# Altium PCB PCB_main_SAFMR.PcbDoc (part 3 of 3)
Units mm, origin at the board's own origin, x right, y up, seen from the top; angles counter-clockwise.
Board outline 128.65 x 96.9 mm, 4 copper layers (Top Layer 1, Top Layer, Bottom Layer, Bottom Layer 1), stack 0.603 mm thick; 100 components, 147 nets, 534 pads, 161 vias.
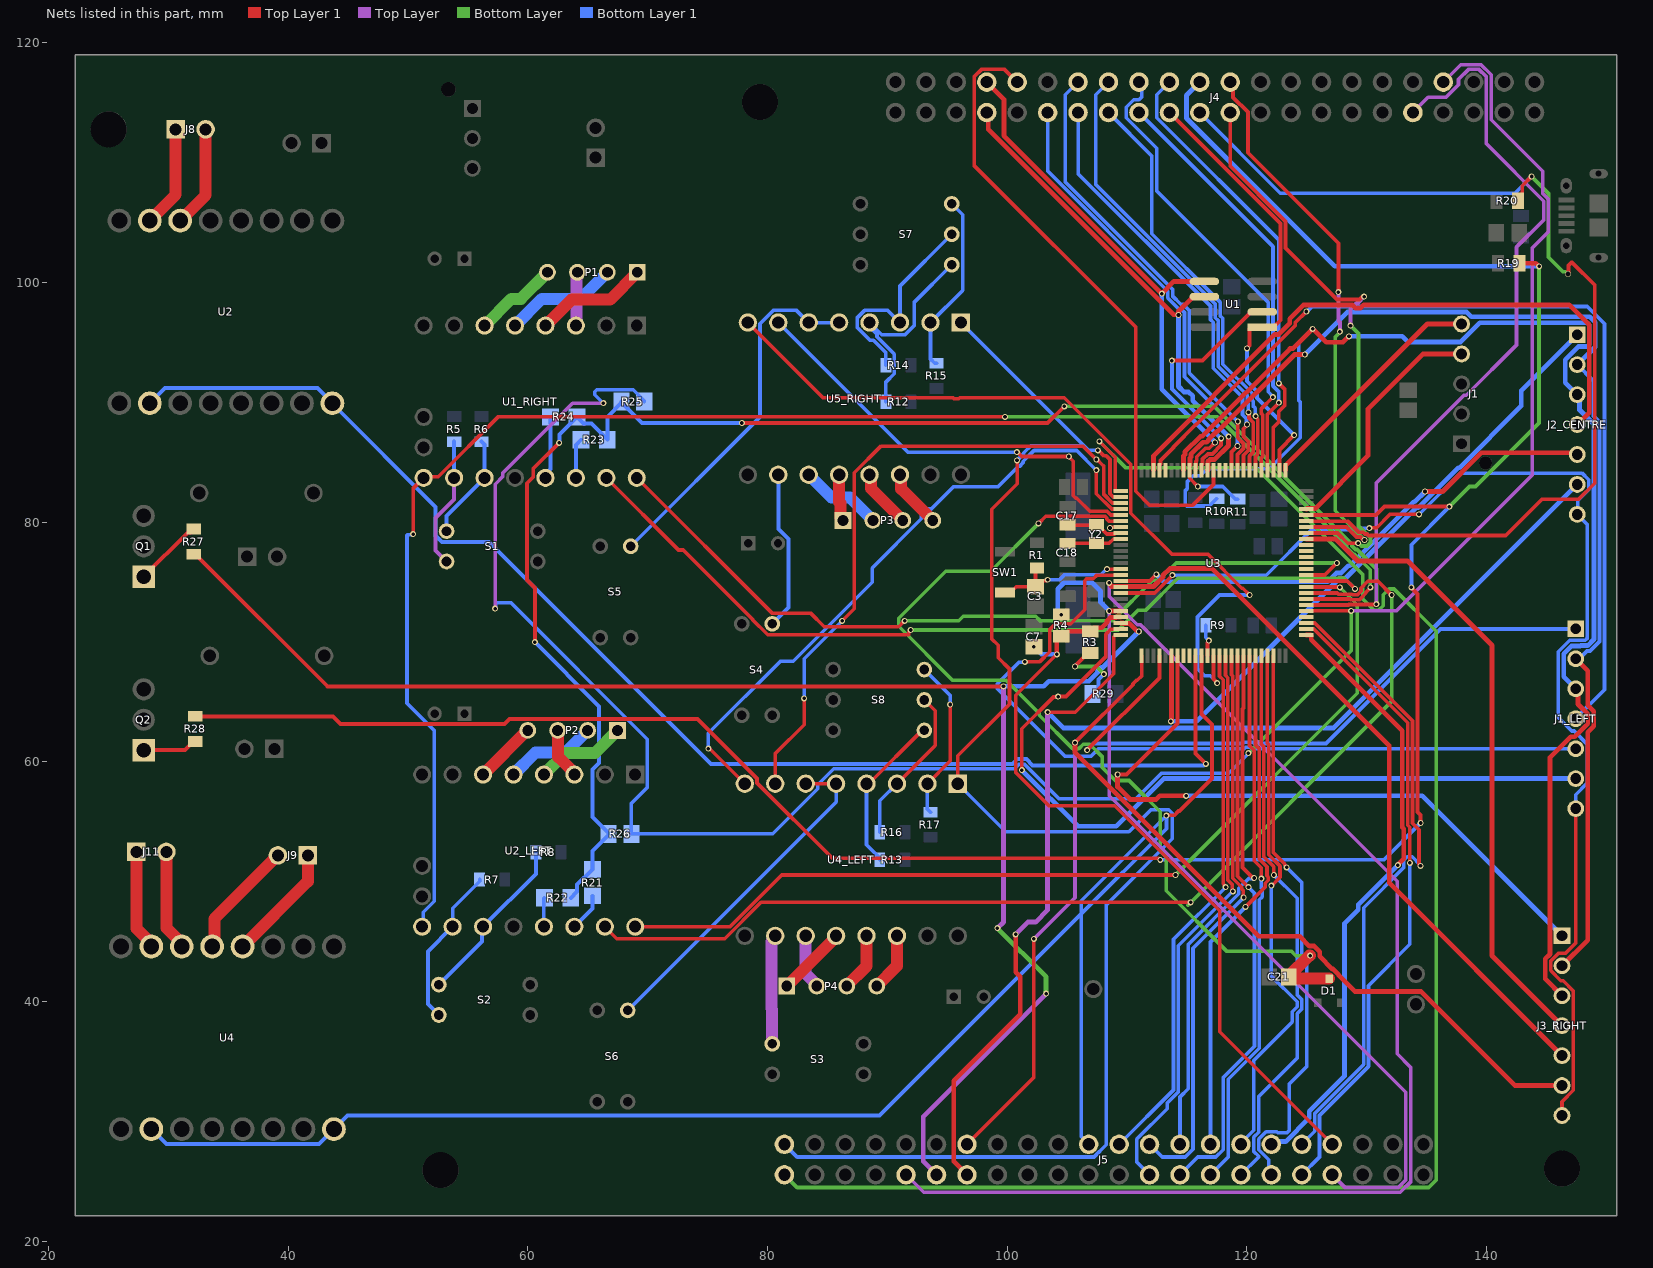
[diagram p4: the nets of this part, all layers, seen from the top]

## Via types
v1: diameter 0.5, hole 0.3, Top Layer 1 to Bottom Layer 1, 159 vias
v2: diameter 0.5, hole 0.4, Top Layer 1 to Bottom Layer 1, 2 vias

## Nets (pads, with @x,y where several pads share a name; then routed paths per layer and width w, separated by ;. In a path a pad name is that pad's centre, name@x,y a point inside that pad or via, vN(x,y) a via of type N, cw(c..) or ccw(c..) an arc to the next point about the centre after c; other vN are vias at no path point) (continued)
NetJ8_1: J8.1 U2.7 | length 8.5
  Top Layer 1 w1: U2.7@28.448,105.156 30.607,107.315 J8.1@30.607,112.776
NetJ8_2: J8.2 U2.6 | length 8.5
  Top Layer 1 w1: U2.6@30.988,105.156 33.107,107.275 J8.2@33.107,112.776
NetJ9_1: J9.1 U4.4 | length 9.9
  Top Layer 1 w1: U4.4@36.195,44.577 41.636,50.018 J9.1@41.636,52.18
NetJ9_2: J9.2 U4.5 | length 9.9
  Top Layer 1 w1: U4.5@33.655,44.577 33.843,44.765 33.843,46.887 J9.2@39.136,52.18
NetJ11_1: J11.1 U4.7 | length 8.4
  Top Layer 1 w1: J11.1@27.325,52.468 27.325,46.092 28.575,44.842 U4.7@28.575,44.577
NetJ11_2: J11.2 U4.6 | length 8.4
  Top Layer 1 w1: J11.2@29.825,52.468 29.825,46.132 31.115,44.842 U4.6@31.115,44.577
NetP1_1: P1.1 U1_RIGHT.4 | length 9.5
  Top Layer 1 w1: U1_RIGHT.4@61.468,96.393 63.639,98.564 66.861,98.564 P1.1@69.135,100.838
NetP1_2: P1.2 U1_RIGHT.5 | length 9.5
  Bottom Layer 1 w1: U1_RIGHT.5@58.928,96.393 61.161,98.626 64.423,98.626 P1.2@66.635,100.838
NetP1_3: P1.3 U1_RIGHT.3 | length 4.5
  Top Layer w1: U1_RIGHT.3@64.008,96.393 64.072,96.456 64.072,100.774 P1.3@64.135,100.838
NetP1_4: P1.4 U1_RIGHT.6 | length 7.1
  Bottom Layer w1: U1_RIGHT.6@56.388,96.393 58.621,98.626 59.423,98.626 P1.4@61.635,100.838
NetP2_1: P2.1 U2_LEFT.4 | length 7.7
  Bottom Layer w1: U2_LEFT.4@61.341,58.928 63.131,60.718 65.591,60.718 P2.1@67.484,62.611
NetP2_2: P2.2 U2_LEFT.5 | length 7.7
  Bottom Layer 1 w1: U2_LEFT.5@58.801,58.928 60.653,60.78 63.153,60.78 P2.2@64.984,62.611
NetP2_3: P2.3 U2_LEFT.3 | length 4.3
  Top Layer 1 w1: P2.3@62.484,62.611 62.535,62.56 62.535,60.411 63.881,59.065 U2_LEFT.3@63.881,58.928
NetP2_4: P2.4 U2_LEFT.6 | length 5.2
  Top Layer 1 w1: U2_LEFT.6@56.261,58.928 56.281,58.928 59.964,62.611 P2.4@59.984,62.611
NetP3_1: P3.1 U5_RIGHT.12 | length 3.9
  Top Layer 1 w1: U5_RIGHT.12@85.979,83.947 85.979,81.682 86.093,81.568 86.093,80.337 P3.1@86.293,80.137
NetP3_2: P3.2 U5_RIGHT.11 | length 6.9
  Bottom Layer 1 w1: U5_RIGHT.11@83.439,83.947 85.356,82.03 86.9,82.03 P3.2@88.793,80.137
NetP3_3: P3.3 U5_RIGHT.13 | length 5
  Top Layer 1 w1: U5_RIGHT.13@88.519,83.947 88.62,83.846 88.62,82.81 P3.3@91.293,80.137
NetP3_4: P3.4 U5_RIGHT.14 | length 4.9
  Top Layer 1 w1: U5_RIGHT.14@91.059,83.947 91.16,83.846 91.16,82.77 P3.4@93.793,80.137
NetP4_1: P4.1 U4_LEFT.12 | length 5.9
  Top Layer 1 w1: P4.1@81.614,41.275 85.725,45.386 U4_LEFT.12@85.725,45.466
NetP4_2: P4.2 U4_LEFT.11 | length 4.6
  Top Layer w1: U4_LEFT.11@83.185,45.466 83.185,42.312 84.114,41.383 P4.2@84.114,41.275
NetP4_3: P4.3 U4_LEFT.13 | length 4.9
  Top Layer 1 w1: P4.3@86.614,41.275 86.614,41.287 88.265,42.938 U4_LEFT.13@88.265,45.466
NetP4_4: P4.4 U4_LEFT.14 | length 4.9
  Top Layer 1 w1: P4.4@89.114,41.275 90.805,42.966 U4_LEFT.14@90.805,45.466
NetQ1_1: Q1.1 R27.2 | length 5.8
  Top Layer 1 w0.33: Q1.1@27.94,75.438 31.626,79.124 31.846,79.124 R27.2@32.131,79.409
NetQ2_1: Q2.1 R28.2 | length 4.6
  Top Layer 1 w0.33: Q2.1@27.94,60.96 31.38,60.96 32.108,61.688 R28.2@32.258,61.688
NetR5_2: R5.2 S1.2 U1_RIGHT.15 | length 11
  Top Layer w0.33: S1.2@53.213,76.708 52.294,77.627 52.294,80.344 53.848,81.898 U1_RIGHT.15@53.848,83.693
  Bottom Layer 1 w0.33: U1_RIGHT.15@53.848,83.693 R5.2@53.848,86.707
NetR6_2: R6.2 S1.1 U1_RIGHT.14 | length 8.9
  Bottom Layer 1 w0.33: S1.1@53.213,79.248 53.213,80.518 U1_RIGHT.14@56.388,83.693 56.388,86.453 R6.2@56.134,86.707
NetR7_2: R7.2 S2.2 U2_LEFT.15 | length 13.5
  Bottom Layer 1 w0.3: U2_LEFT.15@53.721,46.228 53.721,47.763 55.973,50.015 R7.2@55.973,50.165
  Bottom Layer 1 w0.33: S2.2@52.578,38.862 51.659,39.781 51.659,44.166 U2_LEFT.15@53.721,46.228
NetR8_2: R8.2 S2.1 U2_LEFT.14 | length 14.4
  Bottom Layer 1 w0.33: S2.1@52.578,41.402 56.155,44.979 56.155,46.122 U2_LEFT.14@56.261,46.228 60.672,50.639 R8.2@60.672,52.451
NetR12_2: R12.2 S7.1 U5_RIGHT.4 | length 18.6
  Bottom Layer 1 w0.3: R12.2@89.882,90.043 89.882,91.687 90.582,92.387 90.582,94.018 89.134,95.466 89.134,95.699 88.519,96.314 U5_RIGHT.4@88.519,96.647 89.534,95.632 91.479,95.632 92.232,96.385 92.232,98.328 S7.1@95.377,101.473
NetR13_2: R13.2 S8.1 U4_LEFT.4 | length 13.5
  Top Layer 1 w0.3: U4_LEFT.4@88.265,58.166 88.455,58.166 92.9,62.611 S8.1@93.091,62.611
  Bottom Layer 1 w0.3: U4_LEFT.4@88.265,58.166 88.265,53.075 89.374,51.966 R13.2@89.374,51.816
NetR14_2: R14.2 S7.2 U5_RIGHT.3 | length 18.5
  Bottom Layer 1 w0.3: R14.2@89.882,93.091 89.882,94.141 88.839,95.184 88.547,95.184 87.504,96.227 87.504,97.067 88.099,97.662 90.044,97.662 U5_RIGHT.3@91.059,96.647 91.059,99.695 S7.2@95.377,104.013
NetR15_2: R15.2 S7.3 U5_RIGHT.2 | length 15.1
  Bottom Layer 1 w0.3: R15.2@94.107,93.252 93.957,93.252 93.599,93.61 U5_RIGHT.2@93.599,96.647 96.281,99.329 96.281,105.649 S7.3@95.377,106.553
NetR16_2: R16.2 S8.2 U4_LEFT.3 | length 13.3
  Top Layer 1 w0.3: U4_LEFT.3@90.805,58.166 93.995,61.356 93.995,64.247 S8.2@93.091,65.151
  Bottom Layer 1 w0.3: R16.2@89.374,54.102 89.374,56.735 U4_LEFT.3@90.805,58.166
NetR17_2: R17.2 S8.3 U4_LEFT.2 | length 13.7
  Top Layer 1 w0.3: U4_LEFT.2@93.345,58.166 95.25,60.071 v1(95.25,64.77)
  Bottom Layer 1 w0.3: S8.3@93.091,67.691 95.25,65.532 v1(95.25,64.77) ; U4_LEFT.2@93.345,58.166 93.345,56.041 R17.2@93.599,55.787
NetR21_2: R21.2 U2_LEFT.11 | length 3.2
  Bottom Layer 1 w0.33: U2_LEFT.11@63.881,46.228 65.405,47.752 R21.2@65.405,48.811
NetR22_2: R22.2 U2_LEFT.12 | length 2.4
  Bottom Layer 1 w0.3: U2_LEFT.12@61.341,46.228 61.341,48.598 R22.2@61.384,48.641
NetR23_2: R23.2 U1_RIGHT.11 | length 3.4
  Bottom Layer 1 w0.33: U1_RIGHT.11@64.008,83.693 64.008,86.444 R23.2@64.432,86.868
NetR24_2: R24.2 U1_RIGHT.12 | length 5.3
  Bottom Layer 1 w0.33: U1_RIGHT.12@61.468,83.693 61.468,84.012 61.892,84.436 R24.2@61.892,88.773
NetS3_1: S3.1 U4_LEFT.10 | length 9.2
  Top Layer w1: S3.1@80.391,36.449 80.391,39.339 80.314,39.416 80.314,44.992 80.645,45.323 U4_LEFT.10@80.645,45.466
NetS4_1: S4.1 U5_RIGHT.10 | length 13.4
  Bottom Layer 1 w0.33: S4.1@80.391,71.501 81.744,72.854 81.744,78.59 80.899,79.435 U5_RIGHT.10@80.899,83.947
NetS5_1: S5.1 U5_RIGHT.5 U5_RIGHT.6 | length 30.5
  Bottom Layer 1 w0.3: S5.1@68.58,77.978 79.374,88.772 79.374,96.557 80.479,97.662 82.424,97.662 U5_RIGHT.6@83.439,96.647 U5_RIGHT.5@85.979,96.647
NetS6_1: S6.1 U4_LEFT.5 U4_LEFT.6 | length 28.7
  Top Layer 1 w0.3: U4_LEFT.6@83.185,58.166 U4_LEFT.5@85.725,58.166
  Bottom Layer 1 w0.3: S6.1@68.326,39.243 85.725,56.642 U4_LEFT.5@85.725,58.166
NetU2_10: U2.10 U2.16 U3.35 | length 112.9
  Top Layer 1 w0.33: U3.35@115.721,68.831 115.721,60.682 v1(116.586,59.817)
  Bottom Layer 1 w0.33: U2.10@28.448,89.916 29.703,91.171 42.433,91.171 U2.16@43.688,89.916 43.688,89.872 52.294,81.266 52.294,78.867 52.832,78.329 56.769,78.329 75.281,59.817 100.44,59.817 100.84,60.217 101.598,60.217 102.132,59.683 116.406,59.683 116.54,59.817 v1(116.586,59.817)
PA0: J5.34 R27.1 U3.23 | length 134.6
  Top Layer 1 w0.33: R27.1@32.131,77.309 32.281,77.309 43.296,66.294 v1(99.695,66.294)
  Top Layer 1 w0.4: U3.23@109.471,71.581 109.678,71.581 109.718,71.541 110.195,71.541 110.851,70.885 110.979,70.885 v1(110.998,70.866)
  Top Layer w0.4: J5.34@94.107,25.527 92.997,26.637 92.997,30.386 v1(103.251,40.64) ; v1(99.187,46.101) 99.695,46.609 v1(99.695,66.294)
  Bottom Layer w0.4: v1(99.187,46.101) 103.251,42.037 v1(103.251,40.64)
  Bottom Layer 1 w0.4: v1(99.695,66.294) 103.047,66.294 103.466,66.713 106.823,66.713 107.527,67.418 107.527,67.538 107.849,67.86 107.992,67.86 v1(110.998,70.866)
PA1: J1_LEFT.6 U3.24 | length 66.1
  Top Layer 1 w0.3: v1(101.219,59.302) 101.219,62.754 103.868,65.403 104.242,65.403 v1(104.261,65.422) 104.28,65.441 104.909,65.441 108.243,68.775 108.243,70.651 108.633,71.041 109.071,71.041 109.111,71.081 U3.24@109.471,71.081
  Bottom Layer 1 w0.4: v1(101.219,59.302) 101.226,59.302 105.918,54.61 109.093,54.61 113.07,58.587 J1_LEFT.6@147.447,58.587
PA2: J2_CENTRE.6 J5.32 U3.25 | length 106.7
  Top Layer 1 w0.3: v1(103.378,64.135) 105.68,64.135 108.89,67.345 108.89,70.44 109.031,70.581 U3.25@109.471,70.581
  Top Layer 1 w0.4: J5.32@96.647,25.527 95.537,26.637 95.537,33.362 101.092,38.917 101.092,42.051 100.711,42.432 v1(100.711,45.593)
  Top Layer w0.4: v1(100.711,45.593) 101.737,46.619 102.372,46.619 103.378,47.625 v1(103.378,64.135)
  Bottom Layer 1 w0.4: v1(103.378,64.135) 104.69,62.823 127.259,62.823 J2_CENTRE.6@147.574,83.138
PA3: J3_RIGHT.6 J5.31 U3.26 | length 100.1
  Top Layer 1 w0.3: J5.31@96.647,28.067 102.235,33.655 v1(102.235,45.212) ; v1(105.664,61.595) 110.498,66.429 110.498,66.501 110.791,66.794 110.863,66.794 111.221,67.152 U3.26@111.221,68.831
  Top Layer 1 w0.4: v1(105.664,61.595) 105.664,60.745 120.982,45.427 124.415,45.427 125.226,44.615 125.614,44.615 126.082,44.146 126.082,43.759 127.147,42.694 127.204,42.694 127.673,42.225 127.673,42.168 129.03,40.811 134.549,40.811 142.387,32.973 J3_RIGHT.6@146.304,32.973
  Top Layer w0.3: v1(102.235,45.212) 105.664,48.641 v1(105.664,61.595)
PA4: J1_LEFT.1 U3.29 | length 55.4
  Top Layer 1 w0.33: v1(106.68,60.96) 112.721,67.001 U3.29@112.721,68.831
  Bottom Layer 1 w0.33: v1(106.68,60.96) 107.222,61.502 119.623,61.502 119.742,61.621 120.521,61.621 120.64,61.502 126.596,61.502 136.181,71.087 J1_LEFT.1@147.447,71.087
PA6: J2_CENTRE.1 U3.31 | length 53.5
  Top Layer 1 w0.4: v1(113.665,63.373) 113.665,63.4 113.721,63.456 U3.31@113.721,68.831
  Bottom Layer 1 w0.4: v1(113.665,63.373) 115.808,63.373 127.681,75.246 128.189,75.246 134.138,81.195 134.297,81.195 137.64,84.538 137.757,84.538 142.91,89.691 142.91,90.974 J2_CENTRE.1@147.574,95.638
PA7: J3_RIGHT.1 U3.32 | length 55.9
  Top Layer 1 w0.33: v1(109.22,58.928) 109.948,58.928 114.221,63.201 U3.32@114.221,68.831
  Top Layer 1 w0.4: v1(109.22,58.928) 109.22,57.896 110.262,56.854 112.437,56.854 112.733,57.15 v1(114.935,57.15)
  Bottom Layer 1 w0.4: v1(114.935,57.15) 134.627,57.15 J3_RIGHT.1@146.304,45.473
PA8: J3_RIGHT.4 U3.67 | length 53.3
  Top Layer 1 w0.4: U3.67@124.971,78.581 127.417,78.581 129.249,76.749 133.436,76.749 140.462,69.723 140.462,43.815 J3_RIGHT.4@146.304,37.973
PA9: J4.22 U3.68 | length 49.4
  Top Layer 1 w0.33: J4.22@118.618,114.173 118.618,109.701 123.223,105.096 123.223,102.871 127.509,98.585 129.413,98.585 129.601,98.773 129.761,98.773 v1(129.794,98.806) ; U3.68@124.971,79.081 127.575,79.081 128.424,78.232 v1(129.286,78.232)
  Top Layer w0.33: v1(128.651,96.393) 128.651,97.79 129.143,98.282 129.265,98.282 129.789,98.806 v1(129.794,98.806)
  Bottom Layer w0.33: v1(128.651,96.393) 129.312,95.732 129.312,79.677 129.974,79.015 130.036,79.015 130.338,78.714 130.338,78.287 130.036,77.985 129.579,77.985 129.332,78.232 v1(129.286,78.232)
PA10: J4.21 U3.69 | length 48.5
  Top Layer 1 w0.33: J4.21@118.618,116.713 118.865,116.466 118.865,115.446 120.083,114.228 120.083,110.819 127.635,103.267 v1(127.635,99.187) ; U3.69@124.971,79.581 128.318,79.581 129.152,78.747 129.499,78.747 129.661,78.585 129.692,78.585 129.777,78.5 v1(129.823,78.5)
  Top Layer w0.33: v1(127.635,99.187) 127.635,96.795 127.762,96.668 v1(127.762,95.885)
  Bottom Layer w0.33: v1(127.762,95.885) 127.762,95.839 127.381,95.458 127.381,80.942 v1(129.823,78.5)
PA11: J4.24 R20.2 U3.70 | length 89.8
  Top Layer 1 w0.3: U3.70@124.971,80.081 128.405,80.081 129.324,79.162 129.671,79.162 129.833,79 130.03,79 130.155,78.875 141.601,78.875 144.614,81.888 147.668,81.888 149.024,83.244 149.024,99.78 147.137,101.667 147.098,101.667 146.842,101.411 146.842,100.741 v2(146.812,100.711) ; R20.2@142.634,106.807 142.988,107.161 142.988,108.063 v1(143.764,108.839)
  Bottom Layer w0.3: v1(143.764,108.839) 145.18,107.423 145.18,102.089 146.368,100.901 146.567,100.901 146.758,100.711 v2(146.812,100.711)
  Bottom Layer 1 w0.3: J4.24@116.078,114.173 122.801,107.45 142.375,107.45 v1(143.764,108.839)
PA12: J4.23 R19.2 R28.1 U3.71 | length 212.5
  Top Layer 1 w0.33: R28.1@32.258,63.788 43.737,63.788 44.382,63.143 58.035,63.143 58.468,63.576 74.152,63.576 79.135,58.593 79.135,58.219 85.411,51.943 112.649,51.943 v1(112.776,51.816) ; U3.71@124.971,80.581 130.781,80.581 131.48,81.28 v1(136.906,81.28) ; v1(133.731,74.549) 133.731,74.511 134.239,74.003 134.239,55.793 134.48,55.553 134.48,54.916 v1(134.512,54.883)
  Top Layer 1 w0.4: R19.2@142.761,101.6 144.118,101.6 144.372,101.346 v1(144.399,101.346)
  Bottom Layer w0.33: v1(136.906,81.28) 138.577,82.951 139.099,82.951 144.399,88.251 v1(144.399,101.346)
  Bottom Layer 1 w0.33: v1(112.776,51.816) 131.445,51.816 v1(134.512,54.883) ; v1(133.731,74.549) 133.731,78.105 v1(136.906,81.28)
  Bottom Layer 1 w0.4: J4.23@116.051,116.686 114.968,115.603 114.968,113.713 127.335,101.346 v1(144.399,101.346)
PA13: J1.4 U3.72 | length 20.6
  Top Layer 1 w0.4: U3.72@124.971,81.081 125.011,81.121 125.695,81.121 130.107,85.533 130.107,89.424 134.71,94.027 J1.4@137.922,94.027
PA14: J1.5 U3.76 | length 20
  Top Layer 1 w0.4: U3.76@123.221,84.331 123.221,84.691 135.057,96.527 J1.5@137.922,96.527
PA15: J4.26 U1.1 U3.77 | length 38.1
  Top Layer 1 w0.33: J4.26@113.538,114.173 122.793,104.918 122.793,96.843 122.216,96.266 U1.1@121.291,96.266 120.366,96.266 120.219,96.119 120.219,94.738 120.015,94.534 v1(120.015,94.488) ; U3.77@122.721,84.331 122.721,86.018 v1(123.952,87.249)
  Bottom Layer 1 w0.33: v1(120.015,94.488) 120.015,91.752 120.857,90.91 120.857,90.344 v1(123.952,87.249)
PB1: J5.23 U3.36 U4.10 U4.16 | length 143.6
  Top Layer 1 w0.33: v1(113.284,55.499) 113.317,55.532 113.952,55.532 114.3,55.88 114.393,55.88 117.101,58.588 117.101,63.098 116.221,63.978 U3.36@116.221,68.831
  Bottom Layer 1 w0.3: J5.23@106.807,28.067 106.18,28.694 106.18,47.299 106.18,48.395 v1(113.284,55.499)
  Bottom Layer 1 w0.33: U4.10@28.575,29.337 29.83,28.082 42.56,28.082 U4.16@43.815,29.337 44.958,30.48 89.361,30.48 106.18,47.299 113.284,54.403 v1(113.284,55.499)
PB2: R9.2 U3.37 | length 2.7
  Top Layer 1 w0.3: U3.37@116.721,68.831 116.721,69.931 116.84,70.05 v1(116.84,70.104)
  Bottom Layer 1 w0.3: R9.2@116.586,71.374 116.586,70.372 116.84,70.118 v1(116.84,70.104)
PB3: J4.38 U1.6 U3.89 | length 42.6
  Top Layer 1 w0.4: J4.38@98.298,114.173 98.422,114.049 98.422,112.763 113.884,97.301 114.281,97.301 v1(114.3,97.282) 114.3,97.572 115.534,98.806 U1.6@116.459,98.806 ; U3.89@116.721,84.331 116.761,84.371 116.761,85.055 116.937,85.231 117.323,85.231 118.472,86.38 118.472,87.103 v1(118.491,87.122)
  Bottom Layer 1 w0.4: v1(114.3,97.282) 114.3,91.313 114.766,90.847 115.163,90.847 115.485,90.525 115.485,90.128 v1(118.491,87.122)
PB4: U1.2 U3.90 | length 21
  Top Layer 1 w0.33: v1(113.75,93.472) 116.302,93.472 120.27,97.44 121.195,97.44 U1.2@121.291,97.536 ; U3.90@116.221,84.331 116.221,84.761 116.296,84.836 116.296,85.248 116.744,85.696 117.13,85.696 117.862,86.428 117.862,86.973 v1(117.856,86.979)
  Bottom Layer 1 w0.33: v1(113.75,93.472) 113.75,91.085 v1(117.856,86.979)
PB5: J4.37 U1.5 U3.91 | length 45.1
  Top Layer 1 w0.3: U3.91@115.721,84.331 115.721,84.489 115.761,84.529 115.761,85.055 115.831,85.125 115.831,85.44 116.552,86.161 116.867,86.161 v1(117.347,86.642)
  Top Layer 1 w0.4: J4.37@98.298,116.713 99.728,115.283 99.728,112.235 v1(112.903,99.06) 113.919,100.076 U1.5@116.459,100.076
  Bottom Layer 1 w0.4: v1(112.903,99.06) 112.903,91.086 v1(117.347,86.642)
PB6: J1_LEFT.2 J2_CENTRE.2 J3_RIGHT.2 R11.2 U3.92 | length 103.4
  Top Layer 1 w0.3: U3.92@115.221,84.331 115.231,84.321 115.231,83.651 v1(115.915,82.967)
  Top Layer 1 w0.4: U3.92@115.261,84.731 115.261,85.364 115.331,85.434 115.331,85.648 116.344,86.661 116.66,86.661 116.797,86.799 116.797,86.869 117.511,87.583 117.582,87.583 123.979,93.98 v1(124.841,93.98) ; J3_RIGHT.2@146.304,42.973 148.447,45.116 148.447,62.466 148.947,62.966 148.947,64.208 148.447,64.708 148.447,67.587 J1_LEFT.2@147.447,68.587
  Bottom Layer 1 w0.3: v1(115.915,82.967) 118.001,82.967 119.053,81.915 R11.2@119.253,81.915
  Bottom Layer 1 w0.33: J1_LEFT.2@147.447,68.587 147.737,68.587 148.372,69.222 148.63,69.222 149.439,70.031 149.439,88.345 148.939,88.845 148.939,91.773 J2_CENTRE.2@147.574,93.138
  Bottom Layer 1 w0.4: v1(124.841,93.98) 128.388,97.527 138.336,97.527 138.725,97.138 148.605,97.138 149.074,96.669 149.074,94.607 148.605,94.138 148.574,94.138 J2_CENTRE.2@147.574,93.138
PB7: J1_LEFT.3 J2_CENTRE.3 J3_RIGHT.3 R10.2 U3.93 | length 129.7
  Top Layer 1 w0.4: U3.93@114.721,84.331 114.721,85.531 114.831,85.641 114.831,85.855 116.137,87.161 116.296,87.161 123.615,94.48 123.849,94.48 v1(125.492,96.123) 125.494,96.123 126.621,94.996 128.016,94.996 v1(128.524,95.504) ; J3_RIGHT.3@146.304,40.473 144.904,41.873 144.904,43.553 145.304,43.953 145.304,60.358 147.033,62.087 147.361,62.087 148.447,63.173 148.447,64.001 147.638,64.81 147.638,65.896 J1_LEFT.3@147.447,66.087
  Bottom Layer 1 w0.3: R10.2@117.475,81.949 116.868,81.342 114.993,81.342 114.847,81.488 114.847,82.596 115.015,82.764 115.015,83.34 115.542,83.867 116.118,83.867 116.708,84.457 121.867,84.457 124.452,87.042 124.452,90.016 124.341,90.127 124.341,94.972 v1(125.492,96.123)
  Bottom Layer 1 w0.4: v1(128.524,95.504) 132.955,95.504 133.432,95.027 137.836,95.027 139.447,96.638 148.398,96.638 148.574,96.462 148.574,94.814 148.398,94.638 147.66,94.638 146.574,93.552 146.574,91.638 J2_CENTRE.3@147.574,90.638 147.765,90.447 147.765,89.361 148.974,88.152 148.974,70.224 148.437,69.687 147.871,69.687 147.83,69.645 147.091,69.645 146.447,69.001 146.447,67.087 J1_LEFT.3@147.447,66.087
PB9: U3.96
PB10: J5.13 U3.47 | length 44.3
  Top Layer 1 w0.3: U3.47@121.721,68.831 121.721,61.531 121.821,61.431 121.821,52.238 122.77,51.289 122.77,50.355 122.072,49.657 v1(122.047,49.657)
  Bottom Layer 1 w0.3: J5.13@119.507,28.067 119.507,28.157 120.587,29.237 120.587,35.07 123.798,38.281 123.798,39.144 124.198,39.544 124.198,39.958 122.047,42.109 v1(122.047,49.657)
PB11: J5.12 U3.48 | length 47.7
  Top Layer 1 w0.3: U3.48@122.221,68.831 122.221,52.404 123.17,51.455 123.17,51.382 123.317,51.235 v1(123.317,51.181)
  Bottom Layer 1 w0.3: J5.12@122.047,25.527 121.828,25.746 121.828,26.787 120.987,27.628 120.987,28.506 121.608,29.127 122.486,29.127 122.576,29.037 123.351,29.037 123.527,29.213 123.527,33.091 124.998,34.562 124.998,43.392 124.598,43.792 124.598,49.9 v1(123.317,51.181)
PB12: J5.11 U3.51 | length 51.2
  Top Layer 1 w0.4: U3.51@124.971,70.581 125.331,70.581 125.371,70.541 125.371,70.181 132.974,62.578 132.974,54.512 133.096,54.39 133.096,51.892 132.604,51.4 v1(132.604,51.373)
  Bottom Layer 1 w0.4: J5.11@122.047,28.067 122.28,28.3 123.251,28.3 125.217,30.267 125.217,30.832 128.164,33.779 128.164,46.503 129.306,47.645 129.306,48.075 v1(132.604,51.373)
PB13: J5.10 U3.52 | length 53.2
  Top Layer 1 w0.3: U3.52@124.971,71.081 124.981,71.071 125.595,71.071 133.424,63.242 133.424,54.698 133.604,54.518 v1(133.604,51.562)
  Bottom Layer 1 w0.3: J5.10@124.587,25.527 126.067,27.007 126.067,30.48 130.156,34.569 130.156,41.315 133.604,44.763 v1(133.604,51.562)
PB14: J5.9 U3.53 | length 53.7
  Top Layer 1 w0.3: U3.53@124.971,71.581 124.981,71.571 125.66,71.571 133.824,63.407 133.824,54.864 134.012,54.676 134.366,54.322 134.366,51.435 v1(134.493,51.308)
  Bottom Layer 1 w0.3: J5.9@124.587,28.067 125.667,29.147 125.667,30.646 129.756,34.735 129.756,47.818 133.104,51.166 133.104,51.769 133.397,52.062 133.811,52.062 134.455,51.418 134.455,51.346 v1(134.493,51.308)
PB15: U3.54
PC0: J1_LEFT.5 U3.15 | length 67.9
  Top Layer 1 w0.3: v1(101.473,68.326) 102.694,68.326 103.548,69.18 103.548,71.038 104.032,71.522 105.306,71.522 106.467,72.683 106.467,75.112 106.613,75.258 107.179,75.258 107.494,75.573 109.463,75.573 U3.15@109.471,75.581
  Bottom Layer 1 w0.3: v1(101.473,68.326) 101.435,68.288 100.982,68.288 99.195,66.501 99.195,66.087 104.822,60.46 106.997,60.46 107.624,61.087 119.795,61.087 119.914,61.206 120.349,61.206 120.468,61.087 J1_LEFT.5@147.447,61.087
PC1: J2_CENTRE.5 U3.16 | length 43.1
  Top Layer 1 w0.3: U3.16@109.471,75.081 111.894,75.081 v1(112.45,75.637)
  Top Layer 1 w0.4: v1(134.874,82.55) 136.343,82.55 139.57,85.777 147.435,85.777 J2_CENTRE.5@147.574,85.638
  Bottom Layer 1 w0.4: v1(112.45,75.637) 113.072,75.015 126.743,75.015 127.474,75.746 127.855,75.746 128.47,76.361 128.597,76.361 133.931,81.695 134.019,81.695 v1(134.874,82.55)
PC2: J3_RIGHT.5 J5.36 U3.17 | length 165.9
  Top Layer 1 w0.4: v1(108.517,74.93) 108.517,74.903 108.571,74.849 108.571,74.797 108.747,74.621 112.212,74.621 113,75.409 113,75.551 113.564,76.115 117.121,76.115 131.892,61.344 131.892,49.885 J3_RIGHT.5@146.304,35.473
  Top Layer w0.3: J5.36@91.567,25.527 93.027,24.067 132.812,24.067 133.667,24.922 133.667,34.513 132.545,35.635 132.545,50.026 111.134,71.438 110.862,71.438 108.517,73.783 v1(108.517,74.93)
PC3: J1_LEFT.7 J2_CENTRE.7 J3_RIGHT.7 U3.18 | length 103
  Top Layer 1 w0.3: U3.18@109.471,74.081 112.308,74.081 v1(113.792,75.565) ; v1(130.222,79.496) 130.26,79.534 130.842,79.534 131.953,80.645 v1(134.366,80.645) ; J3_RIGHT.7@146.304,30.473 146.304,31.629 147.254,32.579 147.254,40.867 146.397,41.723 146.21,41.723 145.354,42.579 145.354,43.367 146.005,44.018 146.603,44.018 147.447,44.862 J1_LEFT.7@147.447,56.087
  Bottom Layer 1 w0.3: v1(113.792,75.565) 121.634,75.565 125.444,79.375 129.36,79.375 129.481,79.496 v1(130.222,79.496) ; v1(134.366,80.645) 134.383,80.645 137.826,84.088 147.968,84.088 148.524,83.532 148.524,82.709 147.603,81.788 147.603,80.667 J2_CENTRE.7@147.574,80.638 148.397,79.815 148.397,70.283 148.251,70.137 146.946,70.137 145.997,69.188 145.997,63.693 147.13,62.561 147.317,62.561 148.397,61.481 148.397,58.193 147.447,57.243 J1_LEFT.7@147.447,56.087
PC4: U3.33
PC5: U3.34
PC6: U3.63
PC7: U3.64
PC8: U3.65
PC9: U3.66
PC10: J4.25 U3.78 | length 37.7
  Top Layer 1 w0.3: U3.78@122.221,84.331 122.221,87.901 122.682,88.362 122.682,89.258 123.182,89.758 123.182,91.067 v1(122.682,91.567)
  Bottom Layer 1 w0.3: J4.25@113.538,116.713 112.478,115.653 112.478,113.734 122.682,103.53 v1(122.682,91.567)
PC11: J4.28 U3.79 | length 35.1
  Top Layer 1 w0.3: U3.79@121.721,84.331 121.721,89.004 v1(122.682,89.965)
  Bottom Layer 1 w0.3: J4.28@110.998,114.173 122.182,102.989 122.182,91.36 122.682,90.86 v1(122.682,89.965)
PC12: J4.27 U3.80 | length 38.8
  Top Layer 1 w0.3: U3.80@121.221,84.331 121.221,85.376 121.321,85.476 121.321,88.953 121.221,89.053 121.221,89.471 v1(122.174,90.424)
  Bottom Layer 1 w0.3: J4.27@110.998,116.713 111.217,116.494 111.217,115.453 110.997,115.233 110.559,115.233 109.938,114.612 109.938,113.734 112.478,111.194 112.478,107.627 121.782,98.323 121.782,90.87 122.174,90.478 v1(122.174,90.424)
PC13: U3.7 | length 0.9
  Top Layer 1 w0.3: v1(108.585,79.502) 108.639,79.502 108.708,79.571 109.461,79.571 U3.7@109.471,79.581
PC14: C17.2 U3.8 Y2.1 | length 4.7
  Top Layer 1 w0.3: C17.2@105.029,79.768 105.053,79.744 Y2.1@107.442,79.744 ; Y2.1@107.567,79.744 108.309,79.002 108.952,79.002 109.021,79.071 109.461,79.071 U3.8@109.471,79.081
PC15: C18.1 U3.9 Y2.2 | length 4.6
  Top Layer 1 w0.3: C18.1@105.029,78.208 105.065,78.244 Y2.2@107.442,78.244 108.517,78.244 108.844,78.571 109.461,78.571 U3.9@109.471,78.581
PD0: J4.30 U3.81 | length 35.1
  Top Layer 1 w0.3: U3.81@120.721,84.331 120.721,85.441 120.921,85.641 120.921,88.592 120.734,88.78 v1(120.734,88.834)
  Bottom Layer 1 w0.3: J4.30@108.458,114.173 112.078,110.553 112.078,104.051 117.77,98.359 117.77,97.227 118.002,96.995 118.002,93.178 120.442,90.738 120.442,90.172 120.523,90.091 120.523,89.684 120.695,89.511 120.695,88.872 v1(120.734,88.834)
PD1: J4.29 U3.82 | length 38.4
  Top Layer 1 w0.3: v1(120.142,89.154) 120.18,89.116 120.18,88.68 120.521,88.339 120.521,85.807 120.221,85.507 U3.82@120.221,84.331
  Bottom Layer 1 w0.3: J4.29@108.458,116.713 107.398,115.653 107.398,108.165 117.37,98.193 117.37,97.062 117.602,96.83 117.602,93.012 120.042,90.572 120.042,90.006 120.123,89.925 120.123,89.173 v1(120.142,89.154)
PD2: J4.32 U3.83 | length 36.1
  Top Layer 1 w0.3: U3.83@119.721,84.331 119.721,85.573 120.121,85.973 120.121,86.718 119.721,87.118 119.721,87.79 120.015,88.084 v1(120.015,88.138)
  Bottom Layer 1 w0.3: J4.32@105.918,114.173 105.918,109.079 116.97,98.027 116.97,96.896 117.202,96.664 117.202,92.846 119.642,90.406 119.642,88.947 119.977,88.612 119.977,88.176 v1(120.015,88.138)
PD3: J4.31 U3.84 | length 39.3
  Top Layer 1 w0.3: U3.84@119.221,84.331 119.221,85.638 119.721,86.138 119.721,86.553 119.253,87.021 v1(119.253,88.392)
  Bottom Layer 1 w0.3: J4.31@105.918,116.713 104.858,115.653 104.858,108.378 113.803,99.433 113.803,98.867 114.488,98.182 114.673,98.182 115.2,97.655 115.2,92.445 v1(119.253,88.392)
PD4: J4.34 U3.85 | length 36.7
  Top Layer 1 w0.3: U3.85@118.721,84.331 118.721,85.846 v1(119.221,86.346)
  Bottom Layer 1 w0.3: J4.34@103.378,114.173 103.378,109.292 113.403,99.267 113.403,98.701 114.322,97.782 114.507,97.782 114.8,97.489 114.8,92.138 119.221,87.717 v1(119.221,86.346)
PD5: U3.86
PD6: U3.87
PD7: J4.35 U3.88 | length 53.4
  Top Layer 1 w0.3: J4.35@100.838,116.713 99.778,117.773 97.859,117.773 97.238,117.152 97.238,109.757 110.721,96.274 110.721,82.565 111.871,81.415 115.505,81.415 117.221,83.131 U3.88@117.221,84.331
PD8: J4.7 R25.2 R26.2 U3.55 | length 191.3
  Top Layer 1 w0.3: U3.55@124.971,72.581 v1(128.714,72.581)
  Top Layer w0.3: v1(57.277,72.771) 57.277,83.162 57.914,83.799 57.914,84.099 63.731,89.916 v1(66.294,89.916) ; v1(128.714,72.581) 132.47,72.581 143.835,83.946 143.835,102.897 145.172,104.234 145.172,106.95 144.704,107.418 144.704,109.275 140.398,113.582 140.398,117.318 139.543,118.173 137.858,118.173 J4.7@136.398,116.713
  Bottom Layer w0.3: v1(120.121,60.706) 120.142,60.706 128.714,69.278 v1(128.714,72.581)
  Bottom Layer 1 w0.3: v1(57.277,72.771) 57.315,72.809 57.315,73.142 57.453,73.279 58.57,73.279 69.965,61.884 69.965,57.844 68.642,56.521 R26.2@68.642,53.975 80.429,53.975 84.2,57.746 84.2,58.076 85.526,59.402 100.612,59.402 101.012,59.802 101.426,59.802 104.324,56.904 110.751,56.904 112.884,59.037 118.492,59.037 120.121,60.666 v1(120.121,60.706) ; v1(66.294,89.916) 65.587,90.623 65.587,90.871 65.763,91.047 68.795,91.047 69.723,90.119 R25.2@69.723,90.043
PD9: J4.10 R21.1 R22.1 R23.1 R24.1 R25.1 R26.1 U3.56 | length 192.3
  Top Layer 1 w0.33: v1(60.579,69.977) 60.579,74.493 59.914,75.158 59.914,83.238 60.449,83.773 60.449,84.452 v1(62.611,86.614) ; v1(77.851,88.265) 77.858,88.258 103.371,88.258 v1(104.775,89.662) ; U3.56@124.971,73.081 128.486,73.081 128.512,73.107 130.765,73.107 v1(130.81,73.152)
  Top Layer w0.3: v1(130.81,73.152) 130.81,83.259 138.128,90.577 138.316,90.577 142.509,94.771 142.509,102.947 144.772,105.21 144.772,106.784 139.998,111.558 139.998,117.152 139.377,117.773 138.499,117.773 137.668,116.942 137.668,116.484 136.627,115.443 135.128,115.443 J4.10@133.858,114.173
  Bottom Layer w0.33: v1(104.775,89.662) 117.245,89.662 128.771,78.136 128.771,78.019 129.073,77.717 129.19,77.717 130.817,76.09 130.817,73.159 v1(130.81,73.152)
  Bottom Layer 1 w0.33: v1(60.579,69.977) 65.949,64.607 65.949,59.897 65.402,59.35 65.402,55.389 66.74,54.051 R26.1@66.74,53.975 66.74,53.899 65.405,52.564 R21.1@65.405,51.011 65.385,51.011 64.119,49.745 64.119,49.176 R22.1@63.584,48.641 ; v1(62.611,86.614) 62.644,86.647 62.644,87.305 64.092,88.753 64.627,88.218 65.302,88.218 66.632,86.888 R23.1@66.632,86.868 66.632,88.778 R25.1@67.821,89.967 ; R25.1@67.821,90.043 R25.1@67.821,89.967 ; v1(77.851,88.265) 69.522,88.265 R25.1@67.821,89.967
PD10: U1_RIGHT.16 U2_LEFT.16 U3.57 | length 133.4
  Top Layer 1 w0.3: v1(50.419,78.994) 50.419,82.803 U1_RIGHT.16@51.308,83.693 ; U1_RIGHT.16@51.308,83.693 51.392,83.777 52.512,83.777 57.508,88.773 v1(99.822,88.773) ; U3.57@124.971,73.581 128.6,73.581 128.659,73.522 129.405,73.522 129.932,74.049 129.932,74.125 130.302,74.495 v1(130.302,74.549)
  Bottom Layer w0.3: v1(99.822,88.773) 117.547,88.773 128.356,77.964 128.356,77.847 128.901,77.302 129.018,77.302 130.302,76.018 v1(130.302,74.549)
  Bottom Layer 1 w0.3: v1(50.419,78.994) 50.381,78.956 49.965,78.956 49.911,78.902 49.911,64.874 52.185,62.6 52.185,48.352 51.265,47.432 51.265,46.312 U2_LEFT.16@51.181,46.228
PD11: U2_LEFT.10 U3.58 | length 91.8
  Top Layer 1 w0.3: U2_LEFT.10@66.421,46.228 67.425,45.224 76.428,45.224 79.464,48.26 v1(115.316,48.26) ; U3.58@124.971,74.081 127.523,74.081 127.623,73.981 128.766,73.981 128.825,73.922 129.239,73.922 129.532,74.215 129.532,74.486 130.095,75.049 130.945,75.049 v1(132.08,73.914)
  Bottom Layer w0.3: 115.062,48.006 132.08,65.024 v1(132.08,73.914)
PD12: U2_LEFT.9 U3.59 | length 80.6
  Top Layer 1 w0.3: U2_LEFT.9@68.961,46.228 76.866,46.228 81.184,50.546 v1(114.046,50.546) ; U3.59@124.971,74.581 127.73,74.581 v1(127.762,74.549)
  Bottom Layer w0.3: v1(114.046,50.546) 129.214,65.714 129.214,73.097 v1(127.762,74.549)
PD13: U1_RIGHT.10 U3.60 | length 74.7
  Top Layer 1 w0.3: U1_RIGHT.10@66.548,83.693 72.572,77.669 72.962,77.669 78.755,71.875 78.755,71.859 80.017,70.597 91.772,70.597 91.772,70.763 91.948,70.939 v1(91.948,70.993) ; U3.60@124.971,75.081 128.373,75.081 v1(129.032,74.422)
  Bottom Layer w0.3: v1(91.948,70.993) 109.275,70.993 110.934,72.652 111.586,72.652 114.245,75.311 128.143,75.311 v1(129.032,74.422)
PD14: U1_RIGHT.9 U3.61 | length 69
  Top Layer 1 w0.3: U1_RIGHT.9@69.088,83.693 80.376,72.405 83.593,72.405 84.743,71.255 90.94,71.255 v1(91.44,71.755) ; U3.61@124.971,75.581 126.508,75.581 v1(127.508,76.581)
  Bottom Layer w0.3: v1(91.44,71.755) 95.956,71.755 96.329,72.128 102.383,72.128 102.735,71.776 108.788,71.776 112.149,75.137 112.657,75.137 114.101,76.581 v1(127.508,76.581)
PD15: U3.62
PE0: J1_LEFT.4 U3.97 | length 78
  Top Layer 1 w0.33: U3.97@112.721,84.331 112.721,84.761 112.796,84.836 112.796,85.148 113.866,86.218 113.866,86.254 115.738,88.126 115.782,88.126 124.043,96.387 124.043,96.645 v1(124.968,97.57)
  Bottom Layer 1 w0.33: v1(124.968,97.57) 125.014,97.57 125.436,97.992 148.409,97.992 149.869,96.532 149.869,66.009 J1_LEFT.4@147.447,63.587
PE1: J2_CENTRE.4 U3.98 | length 52.6
  Top Layer 1 w0.4: U3.98@112.221,84.331 112.221,85.531 122.344,95.654 122.652,95.654 123.578,96.579 123.578,96.957 124.74,98.12 128.813,98.12 129.058,97.875 129.514,97.875 129.759,98.12 146.916,98.12 148.574,96.462 148.574,89.138 J2_CENTRE.4@147.574,88.138
PE2: J5.44 U3.1 | length 143.9
  Top Layer 1 w0.3: v1(107.696,86.741) 109.021,85.416 109.021,82.591 109.031,82.581 U3.1@109.471,82.581
  Bottom Layer w0.3: J5.44@81.407,25.527 82.467,24.467 135.186,24.467 135.807,25.088 135.807,70.894 132.287,74.414 131.873,74.414 131.386,73.927 131.386,73.021 131.017,72.652 130.603,72.652 129.683,73.572 129.683,75.62 120.785,84.518 109.919,84.518 v1(107.696,86.741)
PE3: J5.43 U3.2 U4_LEFT.1 U5_RIGHT.1 | length 135.6
  Top Layer 1 w0.3: U4_LEFT.1@95.885,58.166 95.885,60.486 100.195,64.796 100.195,67.734 99.245,68.684 99.245,69.72 98.722,70.243 98.722,81.069 100.838,83.185 100.838,85.124 v1(100.819,85.143) ; v1(107.569,85.979) 107.623,85.979 108.086,85.516 108.286,85.516 108.585,85.217 108.585,82.353 108.847,82.091 109.461,82.091 U3.2@109.471,82.081
  Bottom Layer 1 w0.3: J5.43@81.407,28.067 82.467,27.007 107.246,27.007 108.264,28.025 108.264,48.044 113.784,53.563 113.784,55.706 113.491,55.999 112,55.999 110.161,54.16 99.891,54.16 U4_LEFT.1@95.885,58.166 ; U5_RIGHT.1@96.139,96.647 106.415,86.371 ; v1(100.819,85.143) 101.393,85.716 101.393,85.772 101.992,86.371 106.415,86.371 ; v1(107.569,85.979) 106.807,85.979 106.415,86.371
PE4: U3.3 U4_LEFT.7 | length 55.2
  Top Layer 1 w0.3: U4_LEFT.7@80.645,58.166 80.645,60.682 83.058,63.095 v1(83.058,65.278) ; v1(86.233,71.755) 87.243,72.765 87.243,84.106 89.478,86.341 106.318,86.341 v1(107.442,85.217) 107.496,85.217 107.841,84.872 107.865,84.872 108.077,84.66 108.077,82.296 108.782,81.591 109.461,81.591 U3.3@109.471,81.581
  Bottom Layer 1 w0.3: v1(83.058,65.278) 83.058,68.58 v1(86.233,71.755)
PE5: U3.4 U4_LEFT.8 | length 53.8
  Top Layer 1 w0.3: v1(75.057,61.087) 75.184,61.087 U4_LEFT.8@78.105,58.166 ; v1(107.442,84.328) 107.442,82.365 108.716,81.091 109.461,81.091 U3.4@109.471,81.081
  Bottom Layer 1 w0.3: v1(75.057,61.087) 75.057,62.365 81.084,68.392 82.144,68.392 88.732,74.98 88.732,76.159 92.843,80.27 92.843,80.531 93.399,81.087 93.66,81.087 95.505,82.932 99.205,82.932 100.916,84.643 101.027,84.643 101.319,84.936 101.319,84.991 101.338,85.01 101.338,85.065 102.244,85.971 105.799,85.971 v1(107.442,84.328)
PE6: U3.5 U5_RIGHT.7 | length 36.9
  Top Layer 1 w0.3: v1(100.802,85.841) 100.856,85.841 101.226,85.471 v1(105.156,85.471) 105.156,85.417 105.512,85.061 105.512,82.202 105.721,81.993 105.808,81.993 106.907,80.894 108.336,80.894 108.639,80.591 109.461,80.591 U3.5@109.471,80.581
  Bottom Layer 1 w0.3: U5_RIGHT.7@80.899,96.647 91.705,85.841 v1(100.802,85.841)
PE7: U3.38 U5_RIGHT.8 | length 67.7
  Top Layer 1 w0.3: U5_RIGHT.8@78.359,96.647 84.631,90.375 95.481,90.375 95.551,90.305 95.965,90.305 96.035,90.375 104.769,90.375 110.321,84.823 110.321,80.742 113.735,77.328 116.728,77.328 119.585,74.471 119.673,74.471 v1(120.23,73.914) ; U3.38@117.221,68.831 117.221,66.902 117.521,66.602 v1(117.521,66.548)
  Bottom Layer 1 w0.3: v1(117.521,66.548) 117.521,66.592 116.942,67.171 116.471,67.171 115.886,67.756 115.886,72.078 117.722,73.914 v1(120.23,73.914)
PE8: J5.21 U3.39 | length 44.7
  Top Layer 1 w0.3: U3.39@117.721,68.831 117.721,67.136 118.021,66.836 118.021,49.8 118.237,49.584 v1(118.237,49.53)
  Bottom Layer 1 w0.3: J5.21@109.347,28.067 113.881,32.601 113.881,45.174 v1(118.237,49.53)
PE9: J5.20 U3.40 | length 47.3
  Top Layer 1 w0.3: U3.40@118.221,68.831 118.221,67.202 118.421,67.002 118.421,50.12 118.798,49.743 118.798,49.223 v1(118.836,49.185)
  Bottom Layer 1 w0.3: J5.20@111.887,25.527 110.827,26.587 110.827,28.506 113.367,31.046 113.367,31.521 114.281,32.435 114.281,44.63 v1(118.836,49.185)
PE10: J5.19 U3.41 | length 47.7
  Top Layer 1 w0.3: U3.41@118.721,68.831 118.721,67.267 118.821,67.167 118.821,50.285 119.588,49.518 119.588,49.377 119.695,49.27 119.695,48.707 v1(119.734,48.668)
  Bottom Layer 1 w0.3: J5.19@111.887,28.067 112.947,27.007 114.866,27.007 115.507,27.648 115.507,44.442 v1(119.734,48.668)
PE11: J5.18 U3.42 | length 47.3
  Top Layer 1 w0.3: U3.42@119.221,68.831 119.221,50.451 v1(120.142,49.53)
  Bottom Layer 1 w0.3: J5.18@114.427,25.527 115.907,27.007 117.406,27.007 118.027,27.628 118.027,33.641 120.642,36.256 120.642,47.884 120.639,47.887 120.639,48.633 120.642,48.636 120.642,49.03 v1(120.142,49.53)
PE12: J5.17 U3.43 | length 44.1
  Top Layer 1 w0.3: U3.43@119.721,68.831 119.721,64.479 119.642,64.4 119.642,60.934 119.621,60.913 119.621,60.499 119.642,60.478 119.642,51.173 120.523,50.292 v1(120.615,50.292)
  Bottom Layer 1 w0.3: J5.17@114.427,28.067 114.427,32.016 115.107,32.696 115.107,44.749 119.336,48.978 119.336,49.431 120.159,50.254 120.577,50.254 v1(120.615,50.292)
PE13: J5.16 U3.44 | length 45.5
  Top Layer 1 w0.3: U3.44@120.221,68.831 120.221,61.334 120.621,60.934 120.621,51.741 121.213,51.149 v1(121.213,50.237)
  Bottom Layer 1 w0.3: J5.16@116.967,25.527 118.447,27.007 118.447,33.496 121.042,36.091 121.042,48.05 121.039,48.053 121.039,48.467 121.285,48.713 121.285,49.387 121.213,49.459 v1(121.213,50.237)
PE14: J5.15 U3.45 | length 43.2
  Top Layer 1 w0.3: v1(119.888,47.879) 121.547,49.538 121.547,49.864 121.785,50.102 121.785,50.372 121.685,50.472 121.685,51.243 121.021,51.907 121.021,61.1 120.721,61.4 U3.45@120.721,68.831
  Bottom Layer 1 w0.3: J5.15@116.967,28.067 116.967,44.958 v1(119.888,47.879)
PE15: J5.14 U3.46 | length 47.1
  Top Layer 1 w0.3: U3.46@121.221,68.831 121.221,61.465 121.421,61.265 121.421,52.073 122.248,51.246 122.248,50.552 v1(122.254,50.546)
  Bottom Layer 1 w0.3: J5.14@119.507,25.527 120.987,27.007 120.987,27.062 120.587,27.462 120.587,28.672 120.987,29.072 120.987,32.056 124.198,35.267 124.198,38.978 124.598,39.378 124.598,40.124 124.198,40.524 124.198,48.602 v1(122.254,50.546)
RST: C3.2 R1.2 SW1.1 U3.14 | length 12.1
  Top Layer 1 w0.3: SW1.1@99.822,74.119 100.272,74.119 100.765,74.612 C3.2@102.362,74.612 ; R1.2@102.489,76.166 102.362,76.039 C3.2@102.362,74.612 ; v1(103.378,75.184) 103.324,75.184 103.252,75.112 102.862,75.112 C3.2@102.362,74.612 ; v1(108.331,76.073) 108.335,76.077 109.467,76.077 U3.14@109.471,76.081
  Bottom Layer 1 w0.3: v1(103.378,75.184) 104.36,75.184 104.786,75.609 107.813,75.609 108.277,76.073 v1(108.331,76.073)
VBAT: C21.2 D1.3 U3.6 | length 79.2
  Top Layer 1 w0.3: v1(102.616,79.883) 103.227,80.494 108.171,80.494 108.317,80.348 108.317,80.257 108.493,80.081 U3.6@109.471,80.081
  Top Layer 1 w1: v1(125.282,43.815) 125.21,43.815 123.507,42.112 C21.2@123.507,42.037 123.65,41.894 D1.3@126.873,41.894
  Bottom Layer w0.3: v1(102.616,79.883) 98.636,75.903 94.881,75.903 90.94,71.962 90.94,71.294 95.44,66.794 99.902,66.794 102.679,64.017 102.679,63.872 105.457,61.095 105.99,61.095 106.354,61.46 106.887,61.46 107.95,60.397 107.95,59.491 109.013,58.428 110.173,58.428 112.784,55.817 112.784,52.515 113.276,52.023 113.276,49.226 118.306,44.196 123.698,44.196 124.079,43.815 v1(125.282,43.815)
VDD: R3.1 R29.2 | length 6.5
  Top Layer 1 w0.33: v1(105.664,67.945) 105.664,67.982 106.757,69.075 R3.1@106.934,69.075
  Bottom Layer w0.33: v1(105.664,67.945) 107.442,67.945 v1(108.077,67.31)
  Bottom Layer 1 w0.33: R29.2@107.126,65.659 107.639,66.172 107.639,66.872 v1(108.077,67.31)
VDDA: C7.2 J5.7 R3.2 R4.2 U3.22 | length 65.9
  Top Layer 1 w0.3: v1(104.14,68.961) 100.719,65.54 100.719,59.095 103.493,56.321 108.978,56.321 117.729,47.57 117.729,37.465 J5.7@127.127,28.067
  Top Layer 1 w0.4: v1(104.14,68.961) 104.14,70.168 104.444,70.472 R4.2@104.521,70.472 ; R4.2@104.698,70.472 105.105,70.879 R3.2@106.934,70.879 107.238,71.183 107.889,71.183 108.339,71.633 108.339,71.748 108.632,72.041 109.071,72.041 109.111,72.081 U3.22@109.471,72.081
  Bottom Layer 1 w0.4: v1(102.235,69.596) 102.87,68.961 v1(104.14,68.961)
VREF+: J5.8 R4.1 U3.21 | length 73.9
  Top Layer 1 w0.4: v1(108.517,72.579) 108.518,72.58 109.071,72.58 109.072,72.581 U3.21@109.471,72.581
  Top Layer w0.3: v1(108.517,72.579) 108.517,67.577 108.577,67.517 108.577,67.103 108.517,67.043 108.517,57.151 133.267,32.401 133.267,25.088 132.646,24.467 128.187,24.467 J5.8@127.127,25.527
  Bottom Layer 1 w0.4: v1(104.518,72.276) 104.518,72.303 104.225,72.596 104.225,74.412 104.744,74.931 107.092,74.931 107.795,74.228 107.795,73.301 v1(108.517,72.579)
pads on no net: J1. J2. J3.4 J4.8 J4.9 J4.11 J4.12 J4.13 J4.14 J4.15 J4.16 J4.17 J4.18 J4.19 J4.20 J4.33 J4.36 J4.39 J4.40 J4.41 J4.42 J4.43 J4.44 J5.22 J5.24 J5.25 J5.26 J5.27 J5.28 J5.29 J5.30 J5.33 J5.35 J5.37 J5.38 J5.39 J5.40 J5.41 J5.42 MH1.2 MH2.2 MH3.2 MH4.2 S3.2 S3.A2 S4.2 S4.A2 S5.2 S5.A2 S6.2 S6.A2 U1_RIGHT.13 U1_RIGHT.17 U1_RIGHT.18 U2_LEFT.13 U2_LEFT.17 U2_LEFT.18 U3.30 U3.95

## Polygon pours and split planes (outlines as drawn)
+12 on Bottom Layer "+12_L03_P001" (solid, pour order 1): 31.115,78.74 31.115,111.887 cw(c33.655,111.887) 33.655,114.427 77.089,114.427 cw(c77.089,111.887) 79.629,111.887 79.629,89.789 ccw(c82.169,89.789) 82.169,87.249 98.044,87.249 cw(c98.044,86.106) 99.187,86.106 99.187,45.847 ccw(c101.727,45.847) 101.727,43.307 101.854,43.307 cw(c101.854,41.275) 103.886,41.275 103.886,37.211 cw(c101.346,37.211) 101.346,34.671 66.929,34.671 cw(c66.929,37.211) 64.389,37.211 64.389,44.196 ccw(c61.849,44.196) 61.849,46.736 52.832,46.736 ccw(c52.832,44.196) 50.292,44.196 50.292,39.624 cw(c48.133,39.624) 48.133,37.465 33.401,37.465 cw(c33.401,40.005) 30.861,40.005 30.861,78.994
GND on Top Layer "GND_L02_P000" (solid, pour order 0): 24.638,114.935 cw(c27.178,114.935) 27.178,117.475 147.066,117.475 cw(c147.066,114.935) 149.606,114.935 149.606,25.908 cw(c149.225,25.908) 149.225,25.527 27.178,25.527 cw(c27.178,28.067) 24.638,28.067 24.638,103.505

## Keep-outs
Keep-Out Layer:
  lines w0.4: 22.225,22.098 22.225,33.401 22.225,118.999 150.876,118.999 150.876,24.257 150.368,23.749 150.368,22.098 22.225,22.098

## Silkscreen, mask and mechanical layers (free items; w line width, h text height)
Top Overlay:
  lines w0.4: 47.625,23.622 47.625,119.126 ; 74.041,23.876 74.041,118.999

## Text inside footprints (layer, text, board x,y; h text height)
J3: Mechanical 13 "PCB EDGE" at 150.61,109.817 h0.81 r90
J4: Top Overlay "1" at 147.108,117.348 h1.97 r180; Top Overlay "2" at 147.108,114.808 h1.97 r180; Top Overlay "43" at 88.011,117.348 h1.97 r180; Top Overlay "44" at 88.138,114.808 h1.97 r180; Mechanical 40 "5.029" at 152.197,115.57 h0.39 r180; Mechanical 40 "2.540" at 150.33,115.57 h0.39 r180; Mechanical 40 "2.540" at 146.647,111.506 h0.39 r180; Mechanical 40 "55.880" at 118.148,119.819 h0.39 r180; Mechanical 40 "53.340" at 118.148,110.49 h0.39 r180; Top Component Center "1" at 147.108,117.348 h1.97 r180; Top Component Center "2" at 147.108,114.808 h1.97 r180; Top Component Center "43" at 88.617,117.348 h1.97 r180; Top Component Center "44" at 88.617,114.808 h1.97 r180
J5: Top Overlay "44" at 78.359,26.162 h1.97 r180; Top Overlay "43" at 78.613,28.575 h1.97 r180; Top Overlay "2" at 137.837,26.162 h1.97 r180; Top Overlay "1" at 137.837,28.702 h1.97 r180; Mechanical 40 "53.340" at 108.877,21.844 h0.39 r180; Mechanical 40 "55.880" at 108.877,31.173 h0.39 r180; Mechanical 40 "2.540" at 137.376,22.86 h0.39 r180; Mechanical 40 "2.540" at 141.059,26.924 h0.39 r180; Mechanical 40 "5.029" at 142.926,26.924 h0.39 r180; Top Component Center "44" at 79.346,26.162 h1.97 r180; Top Component Center "43" at 79.346,28.702 h1.97 r180; Top Component Center "2" at 137.837,26.162 h1.97 r180; Top Component Center "1" at 137.837,28.702 h1.97 r180
U3: Top Overlay "25" at 108.966,69.088 h0.61; Top Overlay "26" at 112.395,66.675 h0.61; Top Overlay "50" at 123.822,68.422 h0.61; Top Overlay "51" at 125.092,69.311 h0.61; Top Overlay "75" at 121.92,81.28 h0.61; Top Overlay "76" at 120.015,81.915 h0.61; Top Overlay "100" at 108.963,84.17 h0.61